# EAGLE board stepper_control_board (EAGLE 6.1)
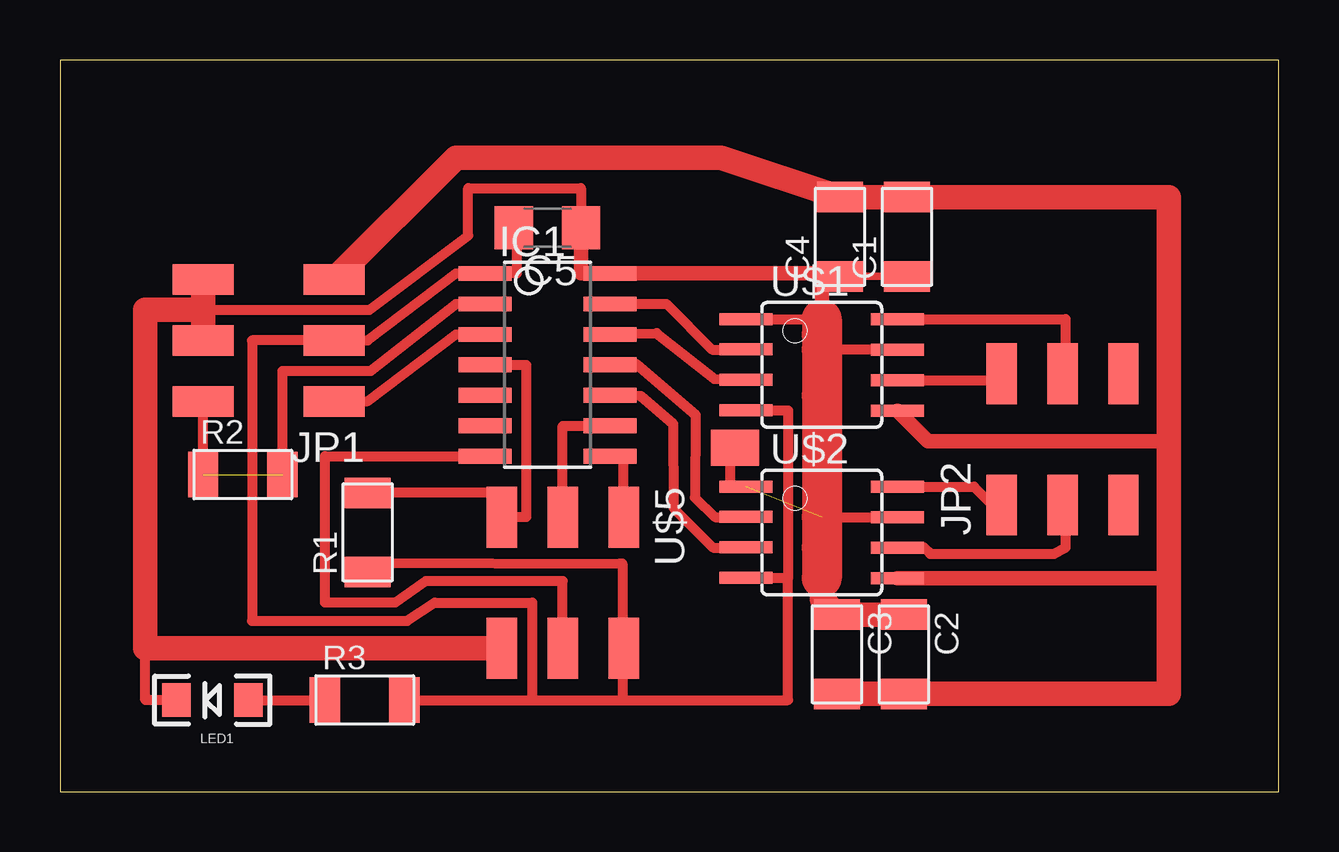
[diagram p0: board, top side]
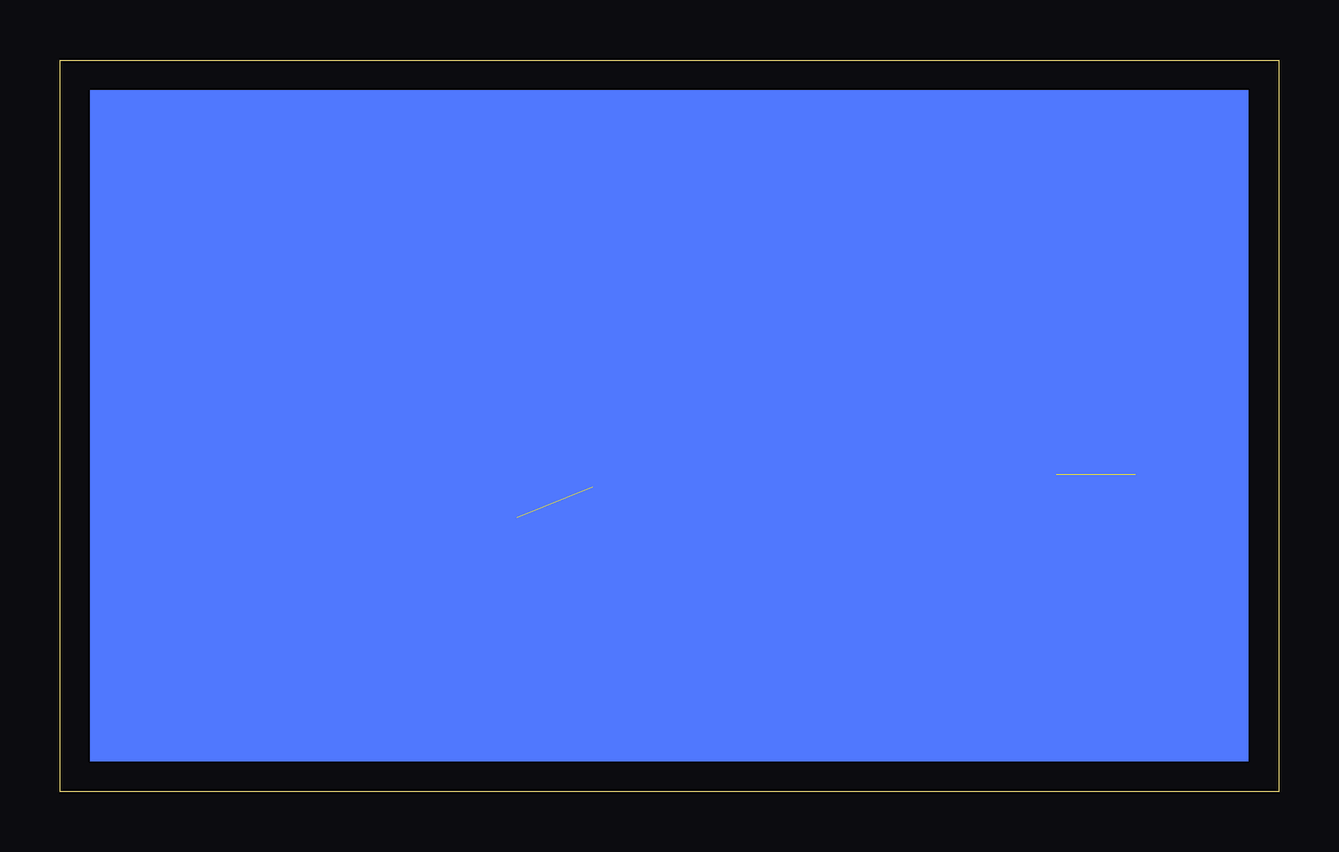
[diagram p1: board, bottom side, seen from below]

Size 50.8 x 30.48 mm. Coordinates in mm from the lower left corner, seen from the top.
Outline: 0,0 50.8,0 50.8,30.48 0,30.47 0,0
Copper layers (1*16): Top 0.035mm / dielectric 1.5mm / Bottom 0.035mm
Design rules: minimum track width 0.3mm, minimum drill 32mil, track to track 0.315mm, track to pad 0.315mm, pad to pad 0.315mm, via to via 0.315mm, smd to smd 0.315mm, copper to edge 40mil, drill to drill 16mil, minimum pad ring 10mil, minimum via ring 8mil, stop-mask expansion 4mil, vias tented up to drill 0mil, thermal gap 10mil

## Footprints (pad centres in the part's own frame; a part is rotated, then mirrored left to right if it is on the bottom)
C1206FAB = smd 1.27 x 1.905: 1 -1.651,0; 2 1.651,0
C1206 = smd 1.6 x 1.8: 1 -1.4,0; 2 1.4,0
SOIC14 = smd 0.61 x 2.21: 1 -3.81,-2.603; 2 -2.54,-2.603; 3 -1.27,-2.603; 4 0,-2.603; 5 1.27,-2.603; 6 2.54,-2.603; 7 3.81,-2.603; 8 3.81,2.603; 9 2.54,2.603; 10 1.27,2.603; 11 0,2.603; 12 -1.27,2.603; 13 -2.54,2.603; 14 -3.81,2.603
2X03SMD = smd 2.54 x 1.27: 1 -2.54,2.54; 2 2.92,2.54; 3 -2.54,0; 4 2.92,0; 5 -2.54,-2.54; 6 2.92,-2.54
PAD-1.5X4.5 = smd 1.5 x 2: P$1 0,0
LED-1206 = smd 1.2 x 1.4: A -1.5,0; C 1.5,0
R1206FAB = smd 1.27 x 1.905: 1 -1.651,0; 2 1.651,0
SOIC8 = smd 0.5 x 2.2: 1 -1.905,-3.154; 2 -0.645,-3.154; 3 0.625,-3.154; 4 1.895,-3.154; 5 1.905,3.154; 6 0.635,3.154; 7 -0.635,3.154; 8 -1.905,3.154

## Placement (x,y rotation side)
C1  .1uF  [C1206FAB]  35.31,23.11 90 top
C2  .1uF  [C1206FAB]  35.18,5.71 270 top
C3  10uF  [C1206FAB]  32.38,5.71 270 top
C4  10uF  [C1206FAB]  32.51,23.11 90 top
C5  [C1206]  20.32,23.5 180 top
IC1  ATTINY44-SSU  [SOIC14]  20.32,17.78 270 top
JP1  [2X03SMD]  8.89,18.8 180 top
JP2  [2X03SMD]  41.78,14.48 90 top
JP3  M01SMD-4.5X1.5  [PAD-1.5X4.5]  28.14,14.33 90 top
LED1  [LED-1206]  6.35,3.81 180 top
R1  10K  [R1206FAB]  12.83,10.79 90 top
R2  0  [R1206FAB]  7.62,13.21 0 top
R3  100  [R1206FAB]  12.7,3.81 0 top
U$1  A4953-H-BRIDGE-MOTOR-DRIVER  [SOIC8]  31.75,17.78 270 top
U$2  A4953-H-BRIDGE-MOTOR-DRIVER  [SOIC8]  31.75,10.79 270 top
U$5  AVRISPSMD  [2X03SMD]  20.95,8.89 270 top

## Library data of the parts
C1-C4 IC1 JP1 JP2 R1-R3 U$1 U$2 U$5 = fab
C5 = adafruit
JP3 LED1 = SparkFun

## Nets
5V: C5.2 IC1.1 JP1.3 R1.1 R3.2 U$1.4 U$2.4 U$5.2
DIR: IC1.2 JP1.2 R2.1 R2.2
GND: C1.1 C2.1 C3.1 C4.1 C5.1 IC1.14 JP1.4 JP1.6 JP3.P$1 LED1.C U$1.1 U$1.7 U$2.1 U$2.7 U$5.6
IN1: IC1.12 U$1.3
IN2: IC1.13 U$1.2
IN3: IC1.10 U$2.3
IN4: IC1.11 U$2.2
MISO: IC1.8 U$5.1
MOSI: IC1.7 U$5.4
N$1: JP2.1 U$2.8
N$2: JP2.3 U$2.6
N$3: JP2.4 U$1.8
N$4: LED1.A R3.1
N$6: JP2.2 U$1.6
RESET: IC1.4 R1.2 U$5.5
SCK: IC1.9 U$5.3
STEP: IC1.3 JP1.1
V+: C1.2 C2.2 C3.2 C4.2 JP1.5 U$1.5 U$2.5

## Tracks (layer width: path | path; a pad name or v marks a point on that pad's centre or on a via)
5V
  Top 0.406: U$1.4 30.35,15.88 30.35,8.89 | 30.35,8.89 29.21,8.89 29.21,8.9 U$2.4 | 19.05,23.5 19.05,21.59 IC1.1 16.51,21.59 12.83,18.8 JP1.3 8,18.8 8,7.11 14.48,7.11 15.62,7.87 19.68,7.87 19.68,3.81 | C5.2 19.05,23.5 | 19.05,23.5 19.05,24.13 | 19.68,3.81 23.32,3.81 | 30.35,8.89 30.35,3.81 23.32,3.81 | 12.95,9.53 12.95,9.14 12.85,9.14 | 12.85,9.14 R1.1 12.95,9.27 | 23.44,5.97 23.44,3.94 23.32,3.81 | U$5.2 23.44,5.97 | 12.85,9.14 12.83,9.53 23.34,9.5 23.44,9.5 23.44,5.97 | R3.2 19.68,3.81
DIR  (1 unrouted)
  Top 0.406: R2.1 JP1.2 | R2.2 9.27,17.53 12.95,17.53 16.51,20.32 IC1.2
GND  (1 unrouted)
  Top 0.305: C1.1 C4.1 31.75,21.21 31.75,19.68 | C3.1 31.75,7.37 31.75,10.16
  Top 0.406: U$1.7 31.75,18.41 | 31.75,11.43 U$2.7 | U$1.1 31.75,19.68 | 31.24,16.54 31.75,16.51 | 3.56,20.07 12.9,20.07 17.02,23.16 17.02,25.15 21.72,25.15 C5.1 | U$2.1 27.94,12.7 27.94,14.33 JP3.P$1 | LED1.C 3.56,3.81 3.56,6.35
  Top 0.61: 21.59,22.86 21.72,22.86 C5.1 21.72,21.59 IC1.14 31.75,21.59 31.75,19.05
  Top 1.016: JP1.4 5.97,20.07 | 5.97,20.07 JP1.6 | U$5.6 3.56,5.97 3.56,6.35 3.56,20.07 5.97,20.07 | C2.1 C3.1 31.75,8 31.75,10.16
  Top 1.676: 31.75,19.68 31.75,19.05 31.75,18.41 31.75,16.51 31.75,11.43 31.75,10.16 31.75,8.89
IN1
  Top 0.406: IC1.12 24.87,19.1 27.28,17.2 28.59,17.14 U$1.3
IN2
  Top 0.406: IC1.13 25.27,20.32 27.18,18.41 28.59,18.41 U$1.2
IN3
  Top 0.406: IC1.10 24.21,16.48 25.55,15.32 25.58,11.81 27.23,10.16 28.59,10.16 U$2.3
IN4
  Top 0.406: IC1.11 24.03,17.8 26.49,15.7 26.47,12.24 27.3,11.43 28.59,11.43 U$2.2
MISO
  Top 0.406: U$5.1 23.5,13.97 IC1.8
MOSI
  Top 0.406: 21.08,5.97 U$5.4 20.95,8.76 15.24,8.76 13.97,7.87 11.05,7.87 11.05,13.97 IC1.7
N$1
  Top 0.406: U$2.8 38.1,12.7 38.86,11.94 JP2.1
N$2
  Top 0.406: U$2.6 36.02,10.16 36.27,9.91 41.43,9.91 41.91,10.16 41.91,11.81 JP2.3
N$3
  Top 0.406: U$1.8 41.91,19.68 41.91,18.03 41.88,17.78 | 41.88,17.78 41.78,17.02 | JP2.4 41.88,17.49 41.88,17.78
N$4
  Top 0.406: LED1.A R3.1 11.43,3.81
N$6
  Top 0.406: U$1.6 39.12,17.14 39.24,17.27 JP2.2
RESET
  Top 0.406: IC1.4 19.43,17.78 19.43,11.43 U$5.5 18.41,12.45 R1.2
SCK
  Top 0.406: U$5.3 20.95,15.24 IC1.9
STEP
  Top 0.406: JP1.1 11.56,16.26 12.83,16.26 16.5,19.05 IC1.3
V+
  Top 0.61: U$2.5 46.23,8.89 | U$1.5 36.17,14.61 46.23,14.61
  Top 1.016: 16.51,26.42 JP1.5 16.51,26.42 | 16.51,26.42 27.56,26.42 C4.2 | C4.2 C1.2 | C4.2 46.23,24.77 46.23,14.61 46.23,8.89 46.23,4.06 C2.2 C3.2
(copper drawn outside any net)
  shapes: Bottom area x1